# EAGLE board Conveyor (EAGLE 9.6.2)
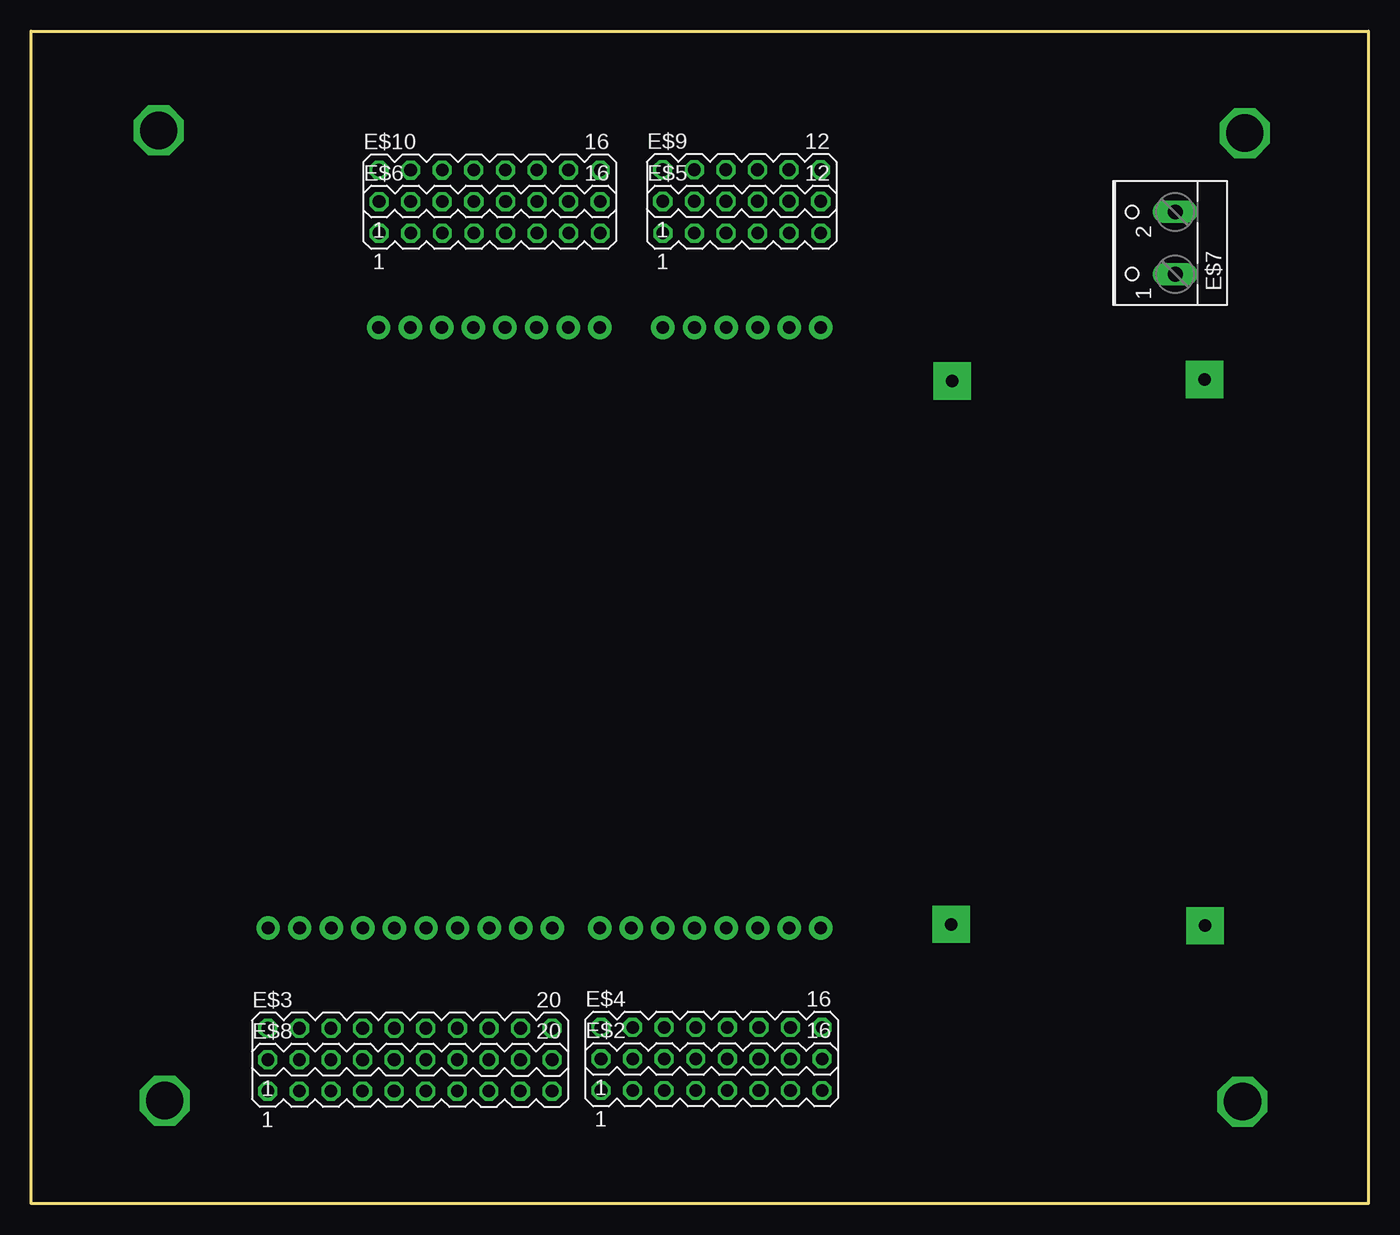
[diagram p0: board, top side]
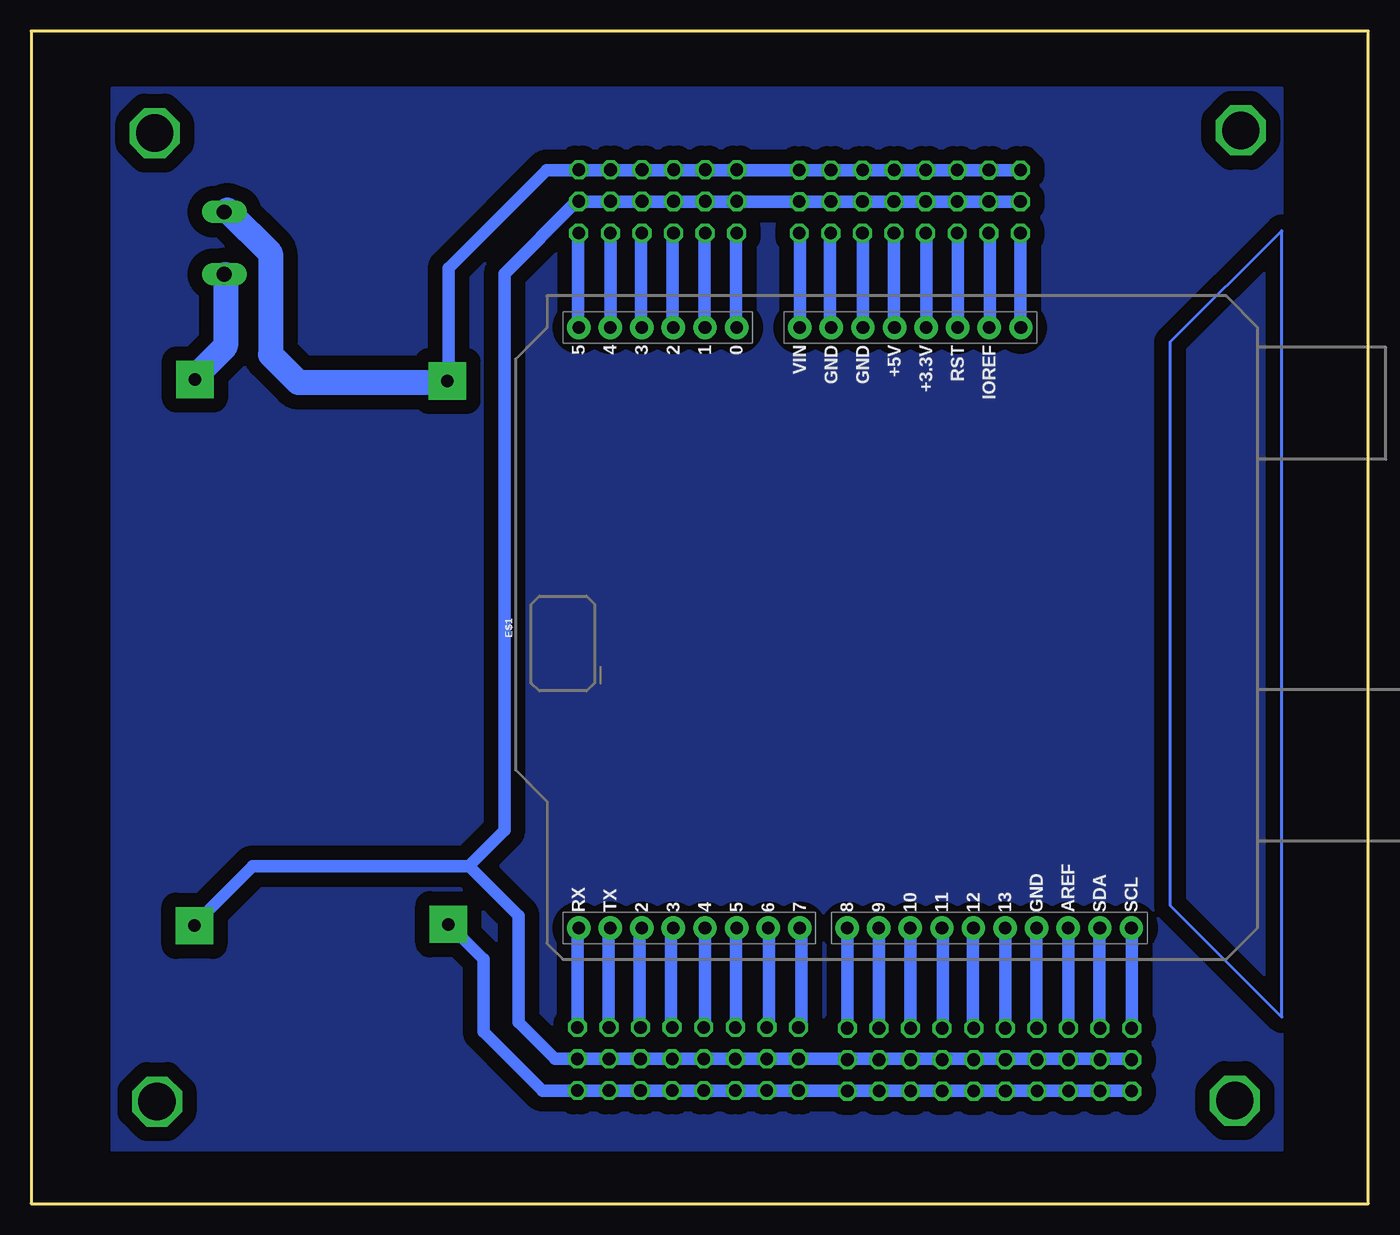
[diagram p1: board, bottom side, seen from below]

Size 107.54 x 94.25 mm. Coordinates in mm from the lower left corner, seen from the top.
Outline: 0,94.25 107.54,94.25 107.54,0 0,0 0,94.25
Copper layers (1*16): Top 0.035mm / dielectric 1.5mm / Bottom 0.035mm
Design rules "default *": minimum track width 6mil, minimum drill 0.35mm, track to track 46mil, track to pad 46mil, pad to pad 6mil, via to via 6mil, smd to smd 6mil, copper to edge 40mil, drill to drill 6mil, minimum pad ring 10mil, minimum via ring 8mil, stop-mask expansion 4mil, vias tented up to drill 0mil, thermal gap 10mil

## Footprints (pad centres in the part's own frame; a part is rotated, then mirrored left to right if it is on the bottom)
UNO_R3_SHIELD = drill 1.016 pad 1.88: 3.3V 24.13,-2.54; 5V 24.13,0; A0 24.13,12.7; A1 24.13,15.24; A2 24.13,17.78; A3 24.13,20.32; A4 24.13,22.86; A5 24.13,25.4; AREF -24.13,-13.97; D2 -24.13,20.32; D3 -24.13,17.78; D4 -24.13,15.24; D5 -24.13,12.7; D6 -24.13,10.16; D7 -24.13,7.62; D8 -24.13,3.81; D9 -24.13,1.27; D10 -24.13,-1.27; D11 -24.13,-3.81; D12 -24.13,-6.35; D13 -24.13,-8.89; GND@0 24.13,2.54; GND@1 24.13,5.08; GND@2 -24.13,-11.43; IOREF 24.13,-7.62; NC 24.13,-10.16; RES 24.13,-5.08; RX -24.13,25.4; SCL -24.13,-19.05; SDA -24.13,-16.51; TX -24.13,22.86; VIN 24.13,7.62
MA08-2 = drill 1.016 octagon: 1 -8.89,-1.27; 2 -8.89,1.27; 3 -6.35,-1.27; 4 -6.35,1.27; 5 -3.81,-1.27; 6 -3.81,1.27; 7 -1.27,-1.27; 8 -1.27,1.27; 9 1.27,-1.27; 10 1.27,1.27; 11 3.81,-1.27; 12 3.81,1.27; 13 6.35,-1.27; 14 6.35,1.27; 15 8.89,-1.27; 16 8.89,1.27
MA10-2 = drill 1.016 octagon: 1 -11.43,-1.27; 2 -11.43,1.27; 3 -8.89,-1.27; 4 -8.89,1.27; 5 -6.35,-1.27; 6 -6.35,1.27; 7 -3.81,-1.27; 8 -3.81,1.27; 9 -1.27,-1.27; 10 -1.27,1.27; 11 1.27,-1.27; 12 1.27,1.27; 13 3.81,-1.27; 14 3.81,1.27; 15 6.35,-1.27; 16 6.35,1.27; 17 8.89,-1.27; 18 8.89,1.27; 19 11.43,-1.27; 20 11.43,1.27
MA06-2 = drill 1.016 octagon: 1 -6.35,-1.27; 2 -6.35,1.27; 3 -3.81,-1.27; 4 -3.81,1.27; 5 -1.27,-1.27; 6 -1.27,1.27; 7 1.27,-1.27; 8 1.27,1.27; 9 3.81,-1.27; 10 3.81,1.27; 11 6.35,-1.27; 12 6.35,1.27
W237-102 = drill 1.194 long: 1 -2.5,-1.27; 2 2.5,-1.27

## Placement (x,y rotation side)
E$1  [UNO_R3_SHIELD]  38.11,46.29 90 bottom
E$2  [MA08-2]  54.72,10.36 0 top
E$3  [MA10-2]  30.47,12.82 0 top
E$4  [MA08-2]  54.72,12.89 0 top
E$5  [MA06-2]  57.15,79.28 0 top
E$6  [MA08-2]  36.88,79.28 0 top
E$7  [W237-102]  90.73,77.21 90 top
E$8  [MA10-2]  30.46,10.31 0 top
E$9  [MA06-2]  57.14,81.84 0 top
E$10  [MA08-2]  36.87,81.81 0 top

## Library data of the parts
E$1 = SparkFun-Boards
E$2-E$6 E$8-E$10 = con-lstb
E$7 = con-wago-500

## Tracks (layer width: path | path; a pad name or v marks a point on that pad's centre or on a via)
S$1
  Bottom 1: 63.6,22.28 63.6,14.28
S$2
  Bottom 1: 61.1,22.28 61.1,14.28
S$3
  Bottom 1: 58.6,22.28 58.6,14.28
S$4
  Bottom 1: 56.1,22.28 56.1,14.28
S$5
  Bottom 1: 53.34,22.17 53.34,14.32 53.43,14.23
S$6
  Bottom 1: 50.84,13.94 50.84,22.04 50.6,22.28
S$7
  Bottom 1: 48.2,14.18 48.2,22.13
S$8
  Bottom 1: 45.6,14.28 45.6,22.28
S$9
  Bottom 1: 41.89,22.17 41.89,14.2 41.83,14.14
S$10
  Bottom 1: 39.38,22.17 39.38,14.23 39.29,14.14
S$11
  Bottom 1: 36.83,22.08 36.83,14.09 36.86,14.06
S$12
  Bottom 1: 34.27,22.19 34.2,22.12 34.2,14.06
S$13
  Bottom 1: 31.79,22.19 31.79,14.24 31.76,14.21
S$14
  Bottom 1: 29.2,22.19 29.2,14.07 29.24,14.03
S$15
  Bottom 1: 26.69,22.26 26.69,14.17
S$16
  Bottom 1: 24.13,22.26 24.13,14.17
S$17
  Bottom 1: 21.62,22.3 21.65,22.27 21.65,14.21
S$18
  Bottom 1: 19.03,22.19 19.03,14.03 19.1,13.96
S$19
  Bottom 1: 63.51,70.35 63.55,70.39 63.55,78.05
S$20
  Bottom 1: 60.96,70.5 60.96,78.09
S$21
  Bottom 1: 58.48,70.32 58.48,77.94 58.44,77.98
S$22
  Bottom 1: 55.96,70.42 55.96,77.94 55.92,77.98
S$23
  Bottom 1: 53.37,70.42 53.37,77.98
S$24
  Bottom 1: 50.85,70.46 50.85,77.94 50.78,78.01
S$25
  Bottom 1: 45.71,70.32 45.71,77.88 45.87,78.04
S$26
  Bottom 1: 43.22,70.32 43.28,70.38 43.28,78.1
S$27
  Bottom 1: 40.63,70.32 40.63,77.98 40.69,78.04
S$28
  Bottom 1: 38.1,70.43 38.15,70.48 38.15,77.94
S$29
  Bottom 1: 35.56,70.43 35.56,77.84 35.61,77.89
S$30
  Bottom 1: 33.02,70.48 33.02,77.89
S$31
  Bottom 1: 30.43,70.32 30.43,77.89 30.53,77.99
S$32
  Bottom 1: 27.89,70.27 28,70.38 28,77.94
S$33  (via drill 1 pad 3)
  other vias: 73.99,22.45
S$34  (via drill 1 pad 3)
  other vias: 74.06,66.13
S$35  (via drill 1 pad 3)
  other vias: 94.36,66.25
S$36  (via drill 1 pad 3)
  other vias: 94.4,22.34
S$37
  Bottom 2: 91.91,74.68 91.91,68.93 94.4,66.44
S$38
  Bottom 2: 91.76,79.86 88.29,76.39 88.29,68.25 86.06,66.02 74.25,66.02
S$39
  pour Bottom: 6.95,89.68 6.95,4.27 101.02,4.27 101.02,89.68
S$40  (via drill 3 pad 4)
  other vias: 97.6,86.05
S$41  (via drill 3 pad 4)
  other vias: 97.41,8.2
S$42  (via drill 3 pad 4)
  other vias: 10.74,8.28
S$43  (via drill 3 pad 4)
  other vias: 10.26,86.27
S$44
  Bottom 1: 94.38,22.44 89.72,27.1 72.32,27.1 68.34,23.12 68.34,14.58 65.4,11.64 19.04,11.64 18.97,11.57
S$45
  Bottom 1: 73.97,22.46 71.16,19.65 71.16,13.82 66.41,9.07 18.99,9.07 18.97,9.05
S$46
  Bottom 1: 27.91,80.54 63.63,80.54 63.66,80.57 69.47,74.76 69.47,29.99 72.35,27.11 73.65,27.11
S$47
  Bottom 1: 27.9,83.07 66.07,83.07 73.95,75.19 73.95,66.31
S$48
  Bottom 0.25: 6.98,78.22 15.95,69.25 15.95,23.97 6.96,14.98 6.96,78.19 6.99,78.22